# EAGLE board buffered-mult (EAGLE 7.2.0)
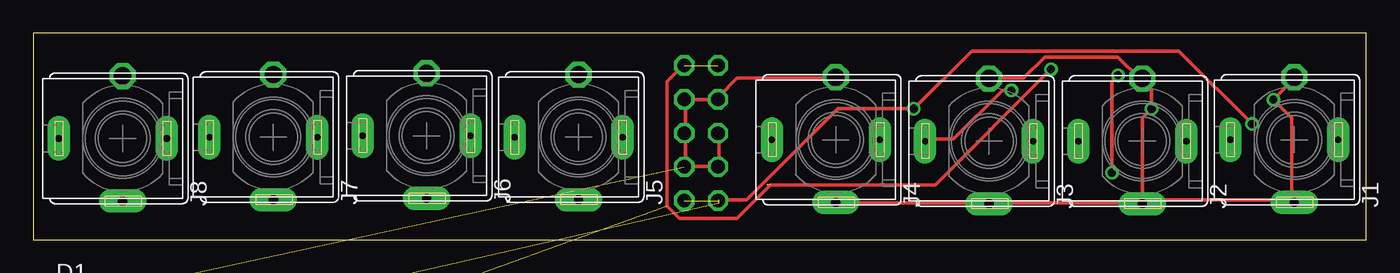
[diagram p0: board, top side]
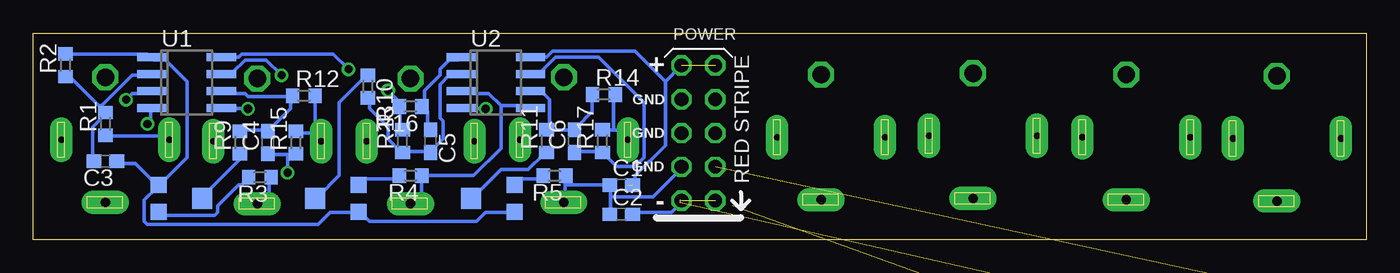
[diagram p1: board, bottom side, seen from below]

Size 100 x 15.5 mm. Coordinates in mm from the lower left corner, seen from the top.
Outline: 0,0 100,0 100,15.5 0,15.5 0,0
Copper layers (1*16): Top 0.035mm / dielectric 1.5mm / Bottom 0.035mm
Design rules "default": minimum track width 10mil, minimum drill 24mil, track to track 8mil, track to pad 8mil, pad to pad 8mil, via to via 8mil, smd to smd 8mil, copper to edge 40mil, drill to drill 8mil, minimum pad ring 10mil, minimum via ring 8mil, stop-mask expansion 4mil, vias tented up to drill 0mil, thermal gap 10mil

## Footprints (pad centres in the part's own frame; a part is rotated, then mirrored left to right if it is on the bottom)
C0603 = smd 1.1 x 1: 1 -0.85,0; 2 0.85,0
PANASONIC_D = smd 3 x 1.4: + 2.4,0; - -2.4,0
SOD123 = smd 1.4 x 1.4: A 1.9,0; C -1.9,0
WQP_PJ_301BM = drill 0.7 pad 1.778 long: GND -4.7,0 | drill 1.3 octagon: GND2 4.7,0 | drill 0.5 pad 1.676 long: SW 0,-3.3; TIP 0,4.8
R0603 = smd 1 x 1.1: 1 -0.85,0; 2 0.85,0
BOURNS_TRIM_3303X3_SMD = smd 1.2 x 1.2: 1 -1,-1.59; 3 1,-1.59 | smd 1.6 x 1.5: 2 0,1.65
EURO_POWER_HEADER = drill 1.016 octagon: 1 -5.08,-1.27; 2 -5.08,1.27; 3 -2.54,-1.27; 4 -2.54,1.27; 5 0,-1.27; 6 0,1.27; 7 2.54,-1.27; 8 2.54,1.27; 9 5.08,-1.27; 10 5.08,1.27
SO08 = smd 0.6 x 2.2: 1 -1.905,-2.6; 2 -0.635,-2.6; 3 0.635,-2.6; 4 1.905,-2.6; 5 1.905,2.6; 6 0.635,2.6; 7 -0.635,2.6; 8 -1.905,2.6

## Placement (x,y rotation side)
C1  [C0603]  55.9,4.1 0 bottom
C2  [C0603]  55.9,1.9 0 bottom
C3  [C0603]  94.6,5.9 180 bottom
C4  [C0603]  82.4,7.3 90 bottom
C5  [C0603]  70.2,7.4 270 bottom
C6  [C0603]  59.4,7.4 90 bottom
C7  [PANASONIC_D]  4.1,-12.3 0 top  (outside the outline)
C8  [PANASONIC_D]  4.1,-19 0 top  (outside the outline)
D1  [SOD123]  2.8,-4.1 0 top  (outside the outline)
D2  [SOD123]  2.8,-7.9 0 top  (outside the outline)
J1  WQP_PJ_301BM  [WQP_PJ_301BM]  94.6,7.5 90 top
J2  WQP_PJ_301BM  [WQP_PJ_301BM]  83.2,7.4 90 top
J3  WQP_PJ_301BM  [WQP_PJ_301BM]  71.7,7.4 90 top
J4  WQP_PJ_301BM  [WQP_PJ_301BM]  60.2,7.5 90 top
J5  WQP_PJ_301BM  [WQP_PJ_301BM]  40.9,7.7 90 top
J6  WQP_PJ_301BM  [WQP_PJ_301BM]  29.5,7.8 90 top
J7  WQP_PJ_301BM  [WQP_PJ_301BM]  18,7.7 90 top
J8  WQP_PJ_301BM  [WQP_PJ_301BM]  6.7,7.6 90 top
R1  [R0603]  94.6,8.7 90 bottom
R2  [R0603]  97.6,13.1 90 bottom
R3  [R0603]  83,4.7 180 bottom
R4  [R0603]  71.7,4.8 180 bottom
R5  [R0603]  60.9,4.8 180 bottom
R6  2K-TRIM  [BOURNS_TRIM_3303X3_SMD]  89,3.1 270 bottom
R7  2K-TRIM  [BOURNS_TRIM_3303X3_SMD]  77.2,3.1 90 bottom
R8  2K-TRIM  [BOURNS_TRIM_3303X3_SMD]  65.5,3.1 90 bottom
R9  [R0603]  84.5,7.3 90 bottom
R10  [R0603]  74.9,11.5 270 bottom
R11  [R0603]  61.5,7.4 90 bottom
R12  [R0603]  79.7,10.8 0 bottom
R13  [R0603]  72.3,7.4 90 bottom
R14  [R0603]  57.2,10.9 0 bottom
R15  [R0603]  80.3,7.3 90 bottom
R16  [R0603]  71.7,10 180 bottom
R17  [R0603]  57.3,7.4 90 bottom
SV1  EURO_POWER_HEADERREGULAR  [EURO_POWER_HEADER]  50.1,8 90 bottom
U1  TL072_SMD  [SO08]  88.5,11.8 270 bottom
U2  TL072_SMD  [SO08]  65.3,11.8 270 bottom

## Library data of the parts
C1-C8 = rcl
D1 D2 = diode
J1-J8 R6-R8 = mjb-parts
R1-R5 R9-R17 = resistor
SV1 U1 U2 = MusicThingModular

## Nets
GND: C1.1 C2.1 C7.- C8.+ D1.A D2.C J1.GND J1.GND2 J2.GND J2.GND2 J3.GND J3.GND2 J4.GND J4.GND2 R3.1 R4.1 R5.1 SV1.3 SV1.4 SV1.5 SV1.6 SV1.7 SV1.8 U1.3 U1.5 U2.3 U2.5
N$1: J1.TIP R1.1
N$2: C3.2 R1.2 R2.1 U1.2
N$3: C4.1 R15.1 U1.7
N$4: R3.2 R6.3
N$5: R4.2 R7.3
N$6: R5.2 R8.3
N$7: C4.2 R9.2 R12.1 U1.6
N$8: R6.2 R9.1
N$9: C5.2 R10.2 R13.1 U2.2
N$10: SV1.9 SV1.10
N$11: SV1.1 SV1.2
N$13: C6.2 R11.2 R14.1 U2.6
N$14: R7.2 R10.1
N$15: R8.2 R11.1
N$16: C3.1 R2.2 R6.1 R7.1 R8.1 U1.1
N$18: J2.TIP R12.2 R15.2
N$19: C5.1 R16.1 U2.1
N$20: J3.TIP R13.2 R16.2
N$22: C6.1 R17.1 U2.7
N$23: J4.TIP R14.2 R17.2
VCC: C1.2 C7.+ D1.C U1.8 U2.8
VEE: C2.2 C8.- D2.A U1.4 U2.4

## Tracks (layer width: path | path; a pad name or v marks a point on that pad's centre or on a via)
GND  (via drill 0.61)  (4 unrouted)
  Top 0.254: 48.92,10.52 51.21,10.52 SV1.8 51.44,10.74 52.81,12.12 60.12,12.12 J4.GND2 | 48.92,5.49 48.92,7.77 SV1.5 48.92,8 48.92,10.52 | SV1.6 51.44,7.77 51.44,5.49 SV1.4 51.21,5.49 48.92,5.49 | 48.92,5.49 SV1.3 | 48.92,10.52 SV1.7 | J1.GND2 94.64,12.12 v93.04,10.52 94.41,9.14 94.41,2.97 | 83.21,2.97 83.21,9.14 v83.9,9.83 83.9,11.2 83.21,11.89 J2.GND2 82.98,12.12 81.38,13.72 75.89,13.72 74.3,12.12 71.78,12.12 J3.GND2 | 83.21,2.97 83.21,2.74 J2.GND | 83.21,2.97 94.41,2.97 | 94.41,2.97 J1.GND | 83.21,2.97 J2.GND | J2.GND 82.98,2.74 71.78,2.74 J3.GND 71.55,2.74 60.35,2.74 J4.GND
  Bottom 0.254: 56.69,3.2 56.69,3.89 C1.1 56.92,4.12 60.12,4.12 | 56.69,3.2 56.69,2.06 C2.1 | 60.12,4.12 60.12,2.97 J4.GND | 60.12,4.12 60.12,4.57 R5.1 | 56.69,3.2 53.49,3.2 51.44,5.26 SV1.4 | J3.GND 71.55,2.74 70.87,3.43 70.87,4.57 R4.1 70.64,4.8 66.98,4.8 64.92,6.86 64.92,10.06 | 64.92,10.06 62.87,10.06 U2.5 | 64.92,10.06 65.84,10.97 67.89,10.97 U2.3 | v93.04,10.52 92.58,10.97 91.21,10.97 U1.3 | R3.1 82.3,4.57 82.3,3.43 82.98,2.74 J2.GND | v83.9,9.83 85.72,9.83 U1.5
N$1
  Bottom 0.254: R1.1 94.41,7.77 90.07,7.77 89.84,7.54 J1.TIP
N$2
  Bottom 0.254: 95.1,10.06 97.38,12.34 R2.1 | 95.1,10.06 94.64,9.6 R1.2 94.64,9.37 95.56,8.46 95.56,5.94 C3.2 | 95.1,10.06 94.87,10.06 92.58,12.34 91.21,12.34 U1.2
N$3  (via drill 0.61)
  Top 0.254: v80.92,5.03 80.92,11.89 v81.38,12.34
  Bottom 0.254: 80.92,6.4 82.3,6.4 C4.1 | 80.92,6.4 80.47,6.4 R15.1 | v80.92,5.03 80.92,6.4 | v81.38,12.34 82.53,13.49 84.12,13.49 85.04,12.57 85.72,12.57 U1.7
N$4
  Bottom 0.254: R3.2 83.9,4.57 84.35,4.12 84.58,4.12 86.18,2.52 86.18,2.06 86.41,1.83 90.3,1.83 90.53,2.06 R6.3
N$5
  Bottom 0.254: R4.2 72.69,4.57 74.98,4.57 75.44,4.12 R7.3
N$6
  Bottom 0.254: R5.2 61.95,4.57 63.32,4.57 63.78,4.12 R8.3
N$7
  Bottom 0.254: 80.7,10.74 80.7,9.83 82.3,8.23 C4.2 82.53,8.23 84.35,8.23 R9.2 | 80.7,10.74 83.9,10.74 84.12,10.97 85.72,10.97 U1.6 | 80.7,10.74 R12.1
N$8
  Bottom 0.254: R9.1 84.58,6.4 84.58,5.94 87.33,3.2 R6.2
N$9
  Bottom 0.254: R10.2 74.75,10.52 74.75,9.83 73.38,8.46 73.38,7.54 72.47,6.63 R13.1 72.24,6.63 70.41,6.63 C5.2 70.18,6.63 69.27,7.54 69.27,8.91 69.49,9.14 69.49,11.66 68.81,12.34 68.12,12.34 U2.2
N$10  (1 unrouted)
N$11  (1 unrouted)
N$13
  Bottom 0.254: 61.27,8.23 61.49,8.23 R11.2 61.27,8.23 | 61.27,8.23 59.44,8.23 C6.2 59.21,8.46 58.06,9.6 58.06,10.74 R14.1 | 61.27,8.23 61.27,10.52 61.72,10.97 62.64,10.97 U2.6
N$14
  Bottom 0.254: R10.1 74.98,12.34 77.04,10.29 77.04,4.8 78.64,3.2 R7.2
N$15
  Bottom 0.254: R11.1 61.72,6.4 62.87,5.26 64.92,5.26 66.98,3.2 R8.2
N$16
  Bottom 0.254: R8.1 64.01,2.06 66.06,2.06 66.75,1.37 74.75,1.37 75.44,2.06 R7.1 75.67,2.06 77.72,2.06 78.64,1.14 91.44,1.14 91.67,1.37 91.67,2.97 90.75,3.89 R6.1 | C3.1 93.73,5.71 92.35,5.71 90.75,4.12 R6.1 | R2.2 97.38,13.95 91.44,13.95 91.21,13.72 U1.1 90.98,13.49 90.07,13.49 88.47,11.89 88.47,6.17 90.53,4.12 R6.1
N$18
  Bottom 0.254: 78.87,8 80.24,8 R15.2 | 78.87,8 78.41,7.54 J2.TIP 78.87,8 | 78.87,8 78.87,10.74 R12.2
N$19
  Bottom 0.254: C5.1 70.41,8.46 70.41,9.6 70.64,9.83 R16.1 70.64,10.06 70.64,11.2 69.49,12.34 69.49,12.8 68.81,13.49 68.12,13.49 U2.1
N$20  (via drill 0.61)
  Top 0.254: v73.38,11.2 72.69,11.2 69.04,7.54 66.98,7.54 J3.TIP
  Bottom 0.254: R13.2 72.47,8.46 72.47,9.83 R16.2 72.69,10.06 72.69,10.52 v73.38,11.2
N$22
  Bottom 0.254: C6.1 59.21,6.63 57.38,6.63 R17.1 57.15,6.4 56.24,5.49 54.86,5.49 54.18,6.17 54.18,10.29 57.61,13.72 60.81,13.72 61.95,12.57 62.64,12.57 U2.7
N$23
  Bottom 0.254: 56.46,8.23 56.24,8.23 55.55,7.54 J4.TIP | 56.46,8.23 57.15,8.23 R17.2 | 56.46,8.23 56.46,10.74 R14.2
VCC  (via drill 0.61)  (3 unrouted)
  Top 0.254: v76.35,12.8 67.67,4.12 55.32,4.12 52.81,1.6 48.46,1.6 47.55,2.52 47.55,11.89 48.69,13.03
  Bottom 0.254: 52.58,11.89 52.58,7.09 54.86,4.8 54.86,4.12 C1.2 | 51.44,13.03 52.58,11.89 | 52.58,11.89 54.86,14.17 61.04,14.17 61.49,13.72 62.64,13.72 U2.8 | v76.35,12.8 77.5,13.95 84.35,13.95 84.58,13.72 85.72,13.72 U1.8
VEE  (via drill 0.61)  (3 unrouted)
  Top 0.254: 51.44,2.97 53.49,2.97 60.35,9.83 v66.06,9.83 70.41,14.17 85.95,14.17 v91.44,8.69
  Bottom 0.254: 51.44,2.74 52.12,2.06 54.86,2.06 C2.2 | v66.06,9.83 67.89,9.83 U2.4 | v91.44,8.69 91.21,8.91 91.21,9.83 U1.4